# Altium PCB balancer.PcbDoc (part 2 of 2)
Units mil, origin at the board's own origin, x right, y up, seen from the top; angles counter-clockwise.
Board outline 6000 x 4000 mil, 2 copper layers (Top Layer, Bottom Layer); 234 components, 201 nets, 774 pads, 0 vias.
Unrouted connection lines stored in the file: 537.
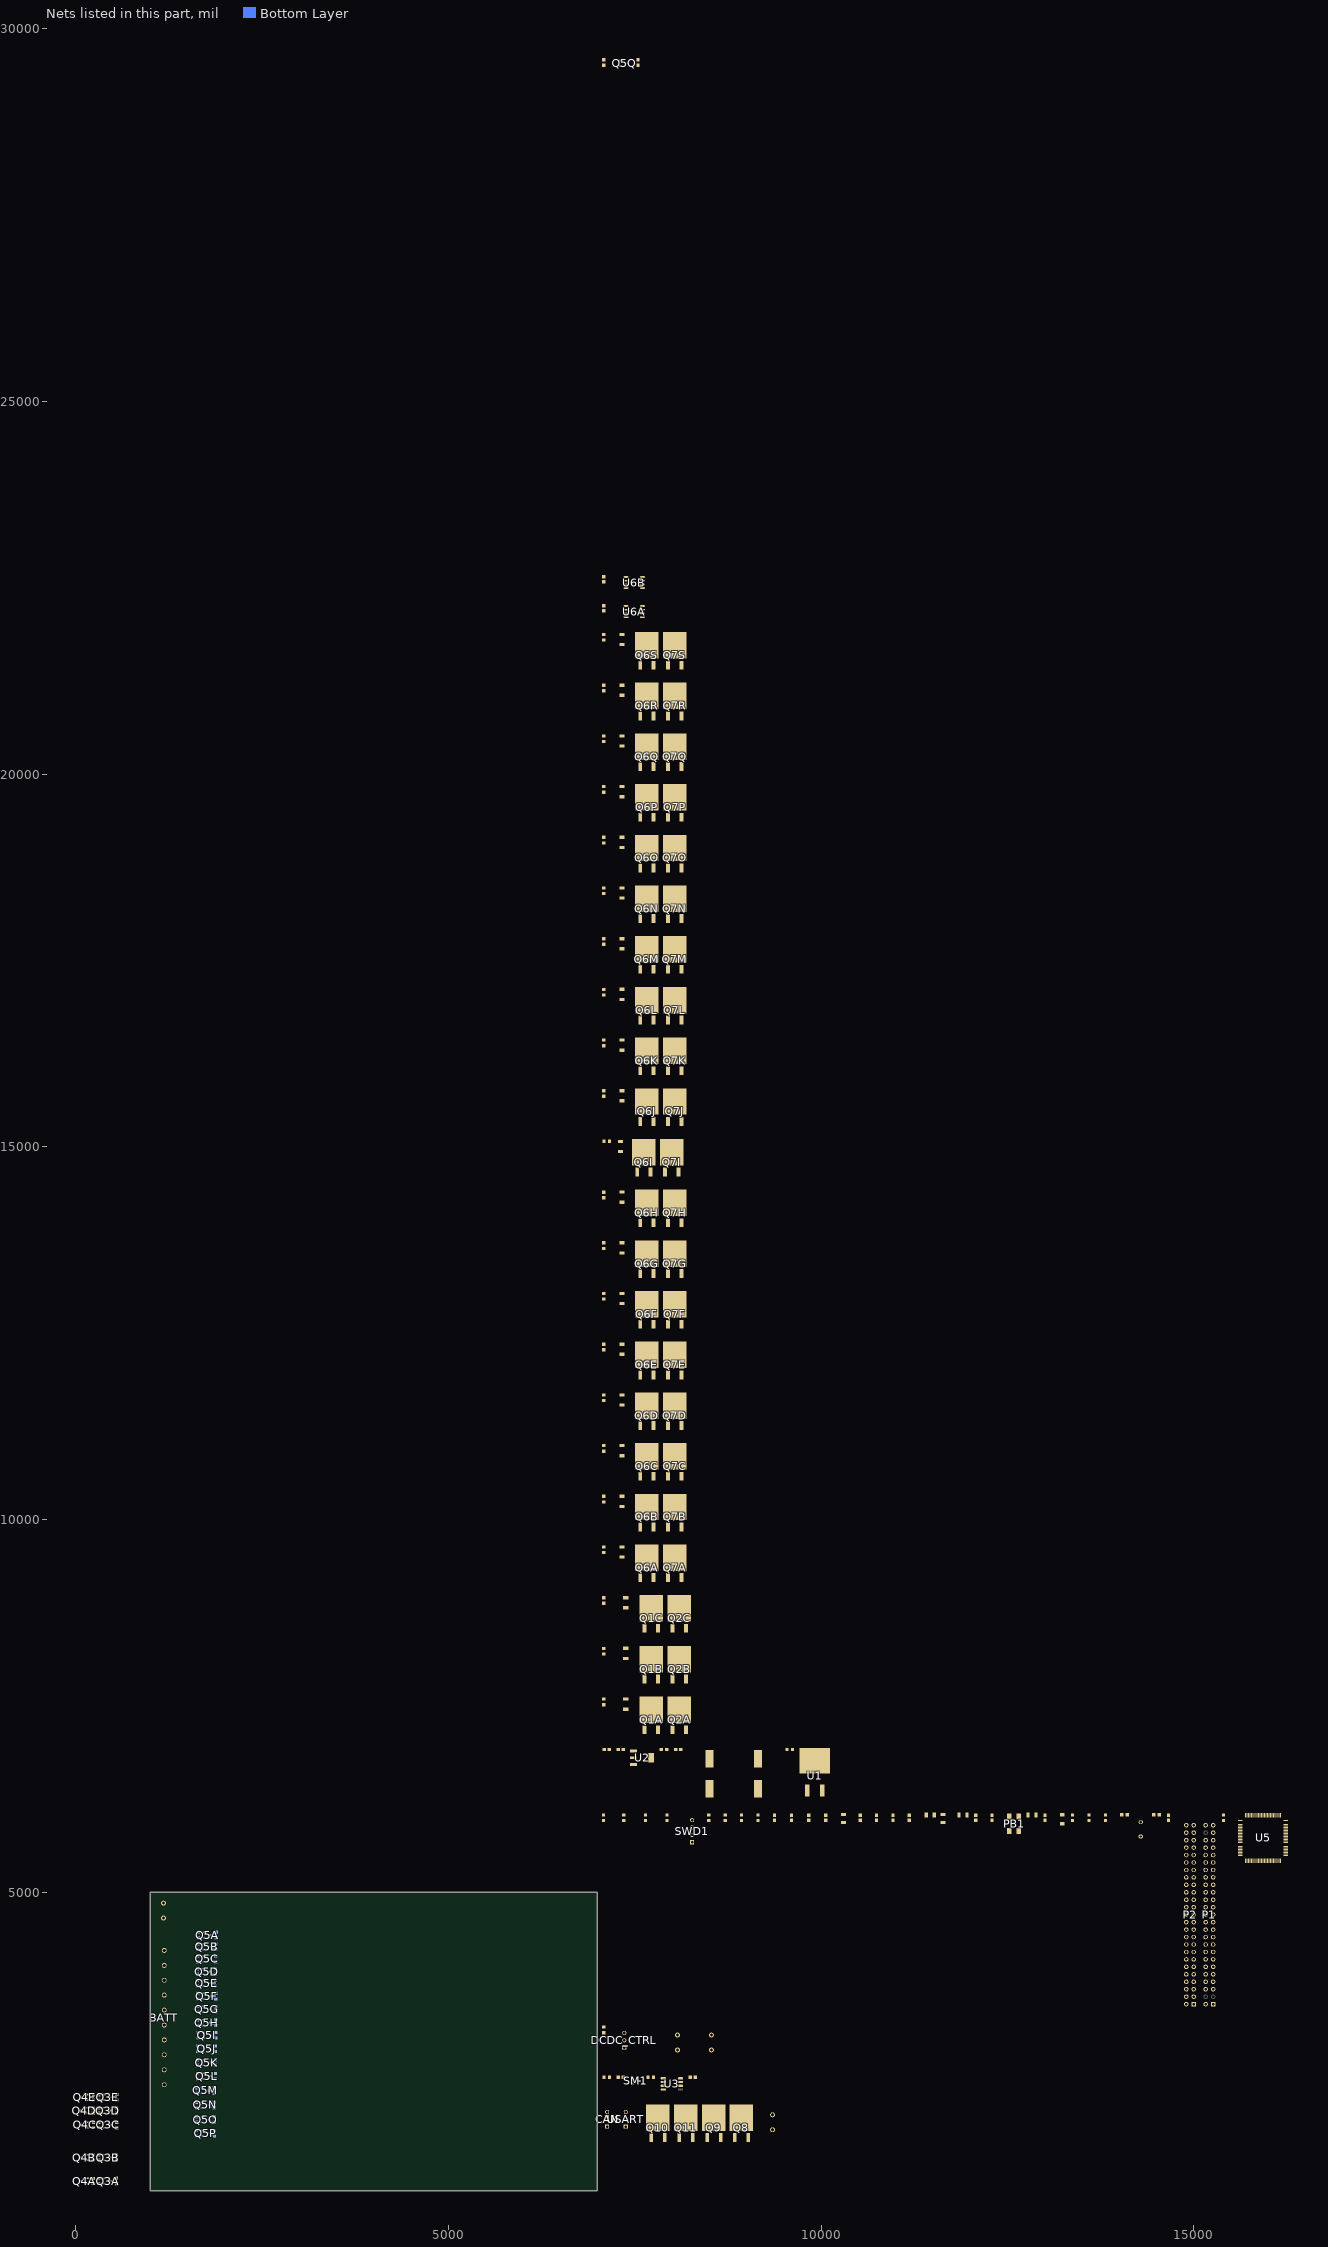
[diagram p2: the nets of this part, all layers, seen from the top]

## Part data
12IN AXBATT INPUT OUTPUT: library part "TERMINAL_BLOCK 1 × 2", "CONN, TERMINAL BLOCK, 5.08mm pitch", =http://www.chila.ir
BATT: library part BATTRY_pack
C1 C2: library part "CAP 10*10"
C3 C4 C5 C6 C10 C11 C13 C15 C16 C17 C18 C19 C20 C23 C24 C25 C26 C28A C28B: library part Capacitor, "Capacitor", LatestRevisionDate=17-Jul-2002, LatestRevisionNote="Re-released for DXP Platform.", PackageReference=C0805, Published=8-Jun-2000, Publisher="Altium Limited"
C7 C8: library part Cap, "Capacitor", LatestRevisionDate=17-Jul-2002, LatestRevisionNote="Re-released for DXP Platform.", PackageDescription="Radial Cap, Thru-Hole; 2 Leads; 0.3 in Pin Spacing", PackageReference=RAD-0.3, Published=8-Jun-2000, Publisher="Altium Limited"
C12 C14 C21 C22 C27: library part Cap_Tan, "Tantalium Capacitor Size C", LatestRevisionDate=17-Jul-2002, LatestRevisionNote="Re-released for DXP Platform.", PackageReference=C0805, Published=8-Jun-2000, Publisher="Altium Limited"
CAN DCDC_CTRL USART: library part Header1*3, "Header, 3-Pin", LatestRevisionDate=17-Jul-2002, LatestRevisionNote="Re-released for DXP Platform.", Publisher="Altium Limited"
L1: library part INDUCTOR, Code_IEC=1005, Code_JEITA=0402, LatestRevisionDate=17-Jul-2002, LatestRevisionNote="Re-released for DXP Platform.", PackageReference=0402-A, Published=8-Jun-2000, Publisher="Altium Limited"
LED1 LED2 LED3 LED4: library part LED, "LED", Adding Date=1387/12/22, Color=Red, Designer="Saeid Jorablo", Organazation=ControTec, Size="SMD 0603"
P1 P2: "Header, 25-Pin, Dual row", LatestRevisionDate=17-Jul-2002, LatestRevisionNote="Re-released for DXP Platform.", Publisher="Altium Limited"
PB1: library part Swtich-PB4, "4-Pin Push Button"
Q1A Q1B Q1C Q2A Q2B Q2C Q8 Q9 Q10 Q11: "N-Channel Power MOSFET", ComponentLink1Description="Manufacturer Link", ComponentLink1URL=http://www.irf.com/, DatasheetVersion=PD-9.814, LatestRevisionDate=17-Jul-2002, LatestRevisionNote="Re-released for DXP Platform.", Note="Pin 2 is electrically connected to pin 4.", PackageDescription="TO, Thru-Hole, Vertical, Heatsink Mounted; 3 In-Line Leads; Pitch 2.54 mm", PackageReference=TO-220AB, PackageVersion=Feb-1997, Published=8-Jun-2000, Publisher="Altium Limited"
Q3A Q3B Q3C Q3D Q3E: library part BC807, "45 V, 0.5 A"
Q4A Q4B Q4C Q4D Q4E Q5A Q5B Q5C Q5D Q5E Q5F Q5G Q5H Q5I Q5J Q5K Q5L Q5M Q5N Q5O Q5P Q5Q: library part BC817, "45 V, 0.5 A", Transistor=BC817
R1A R1B R1C R1D R1E R2A R2B R2C R2D R2E R3A R3B R3C R3D R3E R4A R4B R4C R4D R4E R4F R4G R4H R4I R4J R4K R4L R4M R4N R4O R4P R4Q R5A R5B R5C R5D R5E R5F R5G R5H R5I R5J R5K R5L R5M R5N R5O R5P R5Q R6A R6B R6C R6D R6E R6F R6G R6H R6I R6J R6K R6L R6M R6N R6O R6P R6Q R6R R6S R7 R10 R11 R12 R13 R14 R15 R16 R17 R18 R19A R19B R19C: library part Resistor, "0603,0.1W", LatestRevisionDate=17-Jul-2002, LatestRevisionNote="Re-released for DXP Platform.", PackageReference=AXIAL-0.5, Published=8-Jun-2000, Publisher="Altium Limited"
R8 R9: library part Resistor, "Resistor", Power="1/8 W", Tolerance=5%
SB3: library part SB_ON, ECCN_US/EU=n/a, Revision="July-2002: Re-released for DXP Platform.", Solder=YES
SM1: library part SM712, "Asymmetrical TVS Diode for Extended Common-Mode RS-485"
SWD1: library part Header1*4, "Header, 4-Pin"
U1: "IC REG LIN 5V 1A"
U2: library part AMS1117
U3: library part TJA1040, "1/1 Transceiver Half CANbus 8-SO", Package="SOIC-8 NXP USA", Availability=Unavailable, MF="NXP USA", MP=TJA1040, PRICE=None, SnapEDA_Link=https://www.snapeda.com/parts/TJA1040/NXP%20USA%20Inc./view-part/563351/?ref=snap
U5: "STM32 Manta (STM32F407VGT6)", Manuf_1=STM, Distrib=ST, ECCN_US/EU=3A991A2/NEC, Manuf_Part_1=STM32F407VGT6, Provided=ST, Ref St=9175122
U6A U6B: "Sensing Current"

## Nets (pads, with @x,y where several pads share a name; then routed paths per layer and width w, separated by ;. In a path a pad name is that pad's centre, name@x,y a point inside that pad or via, vN(x,y) a via of type N, cw(c..) or ccw(c..) an arc to the next point about the centre after c; other vN are vias at no path point)
3V3: C5.2 C17.1 C18.1 C19.1 C20.1 C23.1 C24.1 C25.1 C26.1 C27.1 L1.1 P2.5 P2.6 P2.22 R13.2 U2.2 U2.4 U5.6 U5.11 U5.19 U5.28 U5.50 U5.75 U5.100
5V: C2.1 C4.2 C6.2 C7.1 P2.3 P2.4 U1.3 U2.3 U3.3 U6A.8 U6B.8
12V: C1.1 C3.2 Q3A.2 Q3B.2 Q3C.2 Q3D.2 Q3E.2 R1A.2 R1B.2 R1C.2 R1D.2 R1E.2 R7.2 U1.1
12V_IN: 12IN.2 R7.1
BOOT0: P2.21 R12.2 U5.94
CAN_N: CAN.2 R8.2 SM1.1 U3.7
CAN_P: CAN.1 R9.1 SM1.2 U3.6
CAN_RX: P2.36 U3.4 U5.81
CAN_STB: P2.34 U3.8 U5.83
CAN_TX: P2.33 U3.1 U5.82
CurrentSensor_AX: P1.11 U5.24 U6A.7
CurrentSensor_pack: P1.22 U5.35 U6B.7
DAC_Current: DCDC_CTRL.2 P1.15 U5.30
DAC_Voltage: DCDC_CTRL.1 P1.16 U5.29
DCDC_RST1: P1.18 U5.31
DCDC_RST2: P1.17 U5.32
en_ax2pack: P2.47 R3A.1 R5G.1 U5.63
en_MainRelay: P1.20 U5.33
en_pack2ax: P2.48 R3E.1 R5Q.1 U5.64
G_neg_o_2: D1A.1 Q6A.1 Q7A.1 R4A.1 R6A.1
G_neg_o_3: D1B.1 Q6B.1 Q7B.1 R4B.1 R6B.1
G_neg_o_4: D1C.1 Q6C.1 Q7C.1 R4C.1 R6C.1
G_neg_o_5: D1D.1 Q6D.1 Q7D.1 R4D.1 R6D.1
G_neg_o_6: D1E.1 Q6E.1 Q7E.1 R4E.1 R6E.1
G_neg_o_7: D1F.1 Q6F.1 Q7F.1 R4F.1 R6F.1
G_neg_oN_8: D2A.2 Q1A.1 Q2A.1 R2B.1 R19A.2
G_neg_oN_9: D2B.2 Q1B.1 Q2B.1 R2C.1 R19B.2
G_neg_oN_10: D2C.2 Q1C.1 Q2C.1 R2D.1 R19C.2
G_pos_o1: D1K.1 Q6K.1 Q7K.1 R4H.1 R6K.1
G_pos_o2: D1L.1 Q6L.1 Q7L.1 R4I.1 R6L.1
G_pos_o3: D1M.1 Q6M.1 Q7M.1 R4J.1 R6M.1
G_pos_o4: D1N.1 Q6N.1 Q7N.1 R4K.1 R6N.1
G_pos_o5: D1O.1 Q6O.1 Q7O.1 R4L.1 R6O.1
G_pos_o6: D1P.1 Q6P.1 Q7P.1 R4M.1 R6P.1
G_pos_o7: D1Q.1 Q6Q.1 Q7Q.1 R4N.1 R6Q.1
G_pos_o8: D1R.1 Q6R.1 Q7R.1 R4O.1 R6R.1
G_pos_o9: D1S.1 Q6S.1 Q7S.1 R4P.1 R6S.1
GND: 12IN.1 C1.2 C2.2 C3.1 C4.1 C5.1 C6.1 C7.2 C8.2 C10.1 C11.1 C12.2 C13.2 C14.2 C15.1 C16.2 C17.2 C18.2 C19.2 C20.2 C21.2 C22.2 C23.2 C24.2 C25.2 C26.2 C27.2 C28A.1 C28B.1 CAN.3 INPUT.2 LED1.2 LED2.2 LED3.2 LED4.2 P1.1 P1.2 P1.5 P1.23 P1.49 P1.50 P2.1 P2.2 P2.49 P2.50 PB1.2 Q4A.2 Q4B.2 Q4C.2 Q4D.2 Q4E.2 Q5A.2 Q5B.2 Q5C.2 Q5D.2 Q5E.2 Q5F.2 Q5G.2 Q5H.2 Q5I.2 Q5J.2 Q5K.2 Q5L.2 Q5M.2 Q5N.2 Q5O.2 Q5P.2 Q5Q.2 Q10.3 Q11.3 R10.1 R11.1 R12.1 SB3.2 SM1.3 SWD1.4 U1.2 U2.1 U3.2 U5.10 U5.20 U5.27 U5.74 U6A.5 U6B.5 USART.3
LED1: P1.44 R18.2 U5.59
LED2: P1.45 R15.2 U5.60
LED3: P1.46 R16.2 U5.61
LED4: P1.47 R17.2 U5.62
LED5: P2.32 U5.85
LED6: P2.29 U5.86
LED7: P2.30 U5.87
LED8: P2.27 U5.88
M1_1: BATT.1 Q6K.3
M1_2: BATT.2 Q6A.3 Q6L.3
M1_3: BATT.3 Q6B.3 Q6M.3
M1_4: BATT.4 Q6C.3 Q6N.3
M1_5: BATT.5 Q6D.3 Q6O.3
M1_6: BATT.6 Q6E.3 Q6P.3
M1_7: BATT.7 Q6F.3 Q6Q.3
M1_8: BATT.8 Q1A.2 Q6R.3
M1_9: BATT.9 Q1B.2 Q6S.3
M1_10: BATT.10 Q1C.2
M2_neg: Q2A.2 Q2B.2 Q2C.2 Q7A.3 Q7B.3 Q7C.3 Q7D.3 Q7E.3 Q7F.3 Q9.2 Q10.2
M2_pos: Q7K.3 Q7L.3 Q7M.3 Q7N.3 Q7O.3 Q7P.3 Q7Q.3 Q7R.3 Q7S.3 U6B.1 U6B.2
M2_pos_sensed: Q6I.3 Q6J.3 U6B.3 U6B.4
NetAXBATT_1: AXBATT.1 U6A.1 U6A.2
NetAXBATT_2: AXBATT.2 Q8.2 Q11.2
NetC8_1: C8.1 R8.1 R9.2
NetC12_1: C12.1 C13.1 R14.1 U5.21
NetC14_1: C14.1 C15.2 L1.2 R14.2 U5.22
NetC21_1: C21.1 U5.73
NetC22_1: C22.1 U5.49
NetC28A_2: C28A.2 U6A.6
NetC28B_2: C28B.2 U6B.6
NetD1A_2: D1A.2 D1B.2 D1C.2 D1D.2 D1E.2 D1F.2 Q6A.2 Q6B.2 Q6C.2 Q6D.2 Q6E.2 Q6F.2 Q7A.2 Q7B.2 Q7C.2 Q7D.2 Q7E.2 Q7F.2 R6A.2 R6B.2 R6C.2 R6D.2 R6E.2 R6F.2
NetD1G_1: D1G.1 D1J.1 Q6G.1 Q6J.1 Q7G.1 Q7J.1 R4G.1 R6G.1 R6J.1
NetD1G_2: D1G.2 Q6G.2 Q7G.2 R6G.2
NetD1H_1: D1H.1 D1I.1 Q6H.1 Q6I.1 Q7H.1 Q7I.1 R4Q.1 R6H.1 R6I.1
NetD1H_2: D1H.2 Q6H.2 Q7H.2 R6H.2
NetD1I_2: D1I.2 Q6I.2 Q7I.2 R6I.2
NetD1J_2: D1J.2 Q6J.2 Q7J.2 R6J.2
NetD1K_2: D1K.2 D1L.2 D1M.2 D1N.2 D1O.2 D1P.2 D1Q.2 D1R.2 D1S.2 Q6K.2 Q6L.2 Q6M.2 Q6N.2 Q6O.2 Q6P.2 Q6Q.2 Q6R.2 Q6S.2 Q7K.2 Q7L.2 Q7M.2 Q7N.2 Q7O.2 Q7P.2 Q7Q.2 Q7R.2 Q7S.2 R6K.2 R6L.2 R6M.2 R6N.2 R6O.2 R6P.2 R6Q.2 R6R.2 R6S.2
NetD2A_1: D2A.1 D2B.1 D2C.1 Q1A.3 Q1B.3 Q1C.3 Q2A.3 Q2B.3 Q2C.3 R19A.1 R19B.1 R19C.1
NetDCDC_CTRL_3: DCDC_CTRL.3 SB3.1
NetINPUT_1: INPUT.1 Q7G.3 Q7I.3
NetLED1_1: LED1.1 R15.1
NetLED2_1: LED2.1 R16.1
NetLED3_1: LED3.1 R17.1
NetLED4_1: LED4.1 R18.1
NetOUTPUT_1: OUTPUT.1 Q7H.3 Q7J.3
NetOUTPUT_2: OUTPUT.2 Q8.3 Q9.3
NetQ3A_1: Q3A.1 Q4A.3 R1A.1
NetQ3A_3: Q3A.3 R2A.2
NetQ3B_1: Q3B.1 Q4B.3 R1B.1
NetQ3B_3: Q3B.3 R2B.2
NetQ3C_1: Q3C.1 Q4C.3 R1C.1
NetQ3C_3: Q3C.3 R2C.2
NetQ3D_1: Q3D.1 Q4D.3 R1D.1
NetQ3D_3: Q3D.3 R2D.2
NetQ3E_1: Q3E.1 Q4E.3 R1E.1
NetQ3E_3: Q3E.3 R2E.2
NetQ4A_1: Q4A.1 R3A.2
NetQ4B_1: Q4B.1 R3B.2
NetQ4C_1: Q4C.1 R3C.2
NetQ4D_1: Q4D.1 R3D.2
NetQ4E_1: Q4E.1 R3E.2
NetQ5A_1: Q5A.1 R5A.2 | length 72.8
  Bottom Layer w10: R5A.2@1647.87,4390 Q5A.1@1720.63,4390
NetQ5A_3: Q5A.3 R4A.2 | length 88.2
  Bottom Layer w10: Q5A.3@1815.12,4427.4 1822.99,4427.4 1843.74,4406.65 1871.22,4406.65 R4A.2@1887.87,4390
NetQ5B_1: Q5B.1 R5B.2 | length 72.8
  Bottom Layer w10: R5B.2@1640.63,4232.6 Q5B.1@1713.39,4232.6
NetQ5B_3: Q5B.3 R4B.2 | length 88.2
  Bottom Layer w10: Q5B.3@1807.87,4270 1815.75,4270 1836.5,4249.25 1863.98,4249.25 R4B.2@1880.63,4232.6
NetQ5C_1: Q5C.1 R5C.2 | length 72.8
  Bottom Layer w10: R5C.2@1640.63,4070 Q5C.1@1713.39,4070
NetQ5C_3: Q5C.3 R4C.2 | length 88.2
  Bottom Layer w10: Q5C.3@1807.87,4107.4 1815.75,4107.4 1836.5,4086.65 1863.98,4086.65 R4C.2@1880.63,4070
NetQ5D_1: Q5D.1 R5D.2 | length 72.8
  Bottom Layer w10: R5D.2@1637.87,3900 Q5D.1@1710.63,3900
NetQ5D_3: Q5D.3 R4D.2 | length 88.2
  Bottom Layer w10: Q5D.3@1805.12,3937.4 1812.99,3937.4 1833.74,3916.65 1861.22,3916.65 R4D.2@1877.87,3900
NetQ5E_1: Q5E.1 R5E.2 | length 72.8
  Bottom Layer w10: R5E.2@1637.87,3745 Q5E.1@1710.63,3745
NetQ5E_3: Q5E.3 R4E.2 | length 88.2
  Bottom Layer w10: Q5E.3@1805.12,3782.4 1812.99,3782.4 1833.74,3761.65 1861.22,3761.65 R4E.2@1877.87,3745
NetQ5F_1: Q5F.1 R5F.2 | length 72.8
  Bottom Layer w10: R5F.2@1640.63,3570 Q5F.1@1713.39,3570
NetQ5F_3: Q5F.3 R4F.2 | length 88.2
  Bottom Layer w10: Q5F.3@1807.87,3607.4 1815.75,3607.4 1836.5,3586.65 1863.98,3586.65 R4F.2@1880.63,3570
NetQ5G_1: Q5G.1 R5G.2 | length 72.8
  Bottom Layer w10: R5G.2@1642.87,3395 Q5G.1@1715.63,3395
NetQ5G_3: Q5G.3 R4G.2 | length 88.2
  Bottom Layer w10: Q5G.3@1810.12,3432.4 1817.99,3432.4 1838.74,3411.65 1866.22,3411.65 R4G.2@1882.87,3395
NetQ5H_1: Q5H.1 R5H.2 | length 72.8
  Bottom Layer w10: R5H.2@1640.63,3215 Q5H.1@1713.39,3215
NetQ5H_3: Q5H.3 R4H.2 | length 88.2
  Bottom Layer w10: Q5H.3@1807.87,3252.4 1815.75,3252.4 1836.5,3231.65 1863.98,3231.65 R4H.2@1880.63,3215
NetQ5I_1: Q5I.1 R5I.2 | length 72.8
  Bottom Layer w10: R5I.2@1642.87,3045 Q5I.1@1715.63,3045
NetQ5I_3: Q5I.3 R4I.2 | length 88.2
  Bottom Layer w10: Q5I.3@1810.12,3082.4 1817.99,3082.4 1838.74,3061.65 1866.22,3061.65 R4I.2@1882.87,3045
NetQ5J_1: Q5J.1 R5J.2 | length 72.8
  Bottom Layer w10: R5J.2@1637.87,2865 Q5J.1@1710.63,2865
NetQ5J_3: Q5J.3 R4J.2 | length 88.2
  Bottom Layer w10: Q5J.3@1805.12,2902.4 1812.99,2902.4 1833.74,2881.65 1861.22,2881.65 R4J.2@1877.87,2865
NetQ5K_1: Q5K.1 R5K.2 | length 72.8
  Bottom Layer w10: R5K.2@1637.87,2678.82 Q5K.1@1710.63,2678.82
NetQ5K_3: Q5K.3 R4K.2 | length 88.2
  Bottom Layer w10: Q5K.3@1805.12,2716.22 1812.99,2716.22 1833.74,2695.48 1861.22,2695.48 R4K.2@1877.87,2678.82
NetQ5L_1: Q5L.1 R5L.2 | length 72.8
  Bottom Layer w10: R5L.2@1637.87,2495 Q5L.1@1710.63,2495
NetQ5L_3: Q5L.3 R4L.2 | length 88.2
  Bottom Layer w10: Q5L.3@1805.12,2532.4 1812.99,2532.4 1833.74,2511.65 1861.22,2511.65 R4L.2@1877.87,2495
NetQ5M_1: Q5M.1 R5M.2 | length 72.8
  Bottom Layer w10: R5M.2@1621.22,2305 Q5M.1@1693.98,2305
NetQ5M_3: Q5M.3 R4M.2 | length 88.2
  Bottom Layer w10: Q5M.3@1788.46,2342.4 1796.34,2342.4 1817.09,2321.65 1844.57,2321.65 R4M.2@1861.22,2305
NetQ5N_1: Q5N.1 R5N.2 | length 72.8
  Bottom Layer w10: R5N.2@1621.22,2110 Q5N.1@1693.98,2110
NetQ5N_3: Q5N.3 R4N.2 | length 88.2
  Bottom Layer w10: Q5N.3@1788.46,2147.4 1796.34,2147.4 1817.09,2126.65 1844.57,2126.65 R4N.2@1861.22,2110
NetQ5O_1: Q5O.1 R5O.2 | length 72.8
  Bottom Layer w10: R5O.2@1621.22,1915 Q5O.1@1693.98,1915
NetQ5O_3: Q5O.3 R4O.2 | length 88.2
  Bottom Layer w10: Q5O.3@1788.46,1952.4 1796.34,1952.4 1817.09,1931.65 1844.57,1931.65 R4O.2@1861.22,1915
NetQ5P_1: Q5P.1 R5P.2 | length 72.8
  Bottom Layer w10: R5P.2@1622.87,1730 Q5P.1@1695.63,1730
NetQ5P_3: Q5P.3 R4P.2 | length 88.2
  Bottom Layer w10: Q5P.3@1790.12,1767.4 1797.99,1767.4 1818.74,1746.65 1846.22,1746.65 R4P.2@1862.87,1730
NetQ5Q_1: Q5Q.1 R5Q.2
NetQ5Q_3: Q5Q.3 R4Q.2
NetQ6G_3: Q6G.3 Q6H.3 U6A.3 U6A.4
NetQ8_1: Q8.1 Q10.1 R2E.1
NetQ9_1: Q9.1 Q11.1 R2A.1
NetR11_2: R11.2 U5.99
NRST: C16.1 P1.6 PB1.1 R13.1 SWD1.3 U5.14
PA0: P1.12 U5.23
PA2: P1.14 U5.25 USART.1
PA3: P1.13 U5.26 USART.2
PA8: P2.43 U5.67
PA9: P2.44 U5.68
PA10: P2.41 U5.69
PA11: U5.70
PA12: U5.71
PA13: P2.42 SWD1.1 U5.72
PA14: P2.39 SWD1.2 U5.76
PA15: P2.40 U5.77
PB1: P1.21 U5.36
PB2: P1.24 R10.2 U5.37
PB3: P2.28 U5.89
PB4: P2.25 U5.90
PB5: P2.26 U5.91
PB6: P2.23 U5.92
PB7: P2.24 U5.93
PB8: P2.19 U5.95
PB9: P2.20 U5.96
PC0: P1.8 U5.15
PC1: P1.7 U5.16
PC2: P1.10 U5.17
PC3: P1.9 U5.18
PC5: P1.19 U5.34
PC8: P2.45 U5.65
PC9: P2.46 U5.66
PC10: P2.37 U5.78
PC11: P2.38 U5.79
PC12: P2.35 U5.80
PC13: P2.12 U5.7
PC14: P2.9 U5.8
PC15: P2.10 U5.9
PD3: P2.31 U5.84
PD11: P1.43 U5.58
PE0: P2.17 U5.97
PE1: P2.18 U5.98
PE2: P2.15 U5.1
PE3: P2.16 U5.2
PE4: P2.13 U5.3
PE5: P2.14 U5.4
PE6: P2.11 U5.5
PH0: C10.2 P2.7 U5.12 Y1.2
PH1: C11.2 P2.8 U5.13 Y1.1
trig_neg_2: P1.34 R5A.1 U5.47
trig_neg_3: P1.35 R5B.1 U5.48
trig_neg_4: P1.36 R5C.1 U5.51
trig_neg_5: P1.37 R5D.1 U5.52
trig_neg_6: P1.38 R5E.1 U5.53
trig_neg_7: P1.39 R5F.1 U5.54
trig_neg_8: P1.40 R3B.1 U5.55
trig_neg_9: P1.41 R3C.1 U5.56
trig_neg_10: P1.42 R3D.1 U5.57
trig_pos_1: P1.25 R5H.1 U5.38
trig_pos_2: P1.26 R5I.1 U5.39
trig_pos_3: P1.27 R5J.1 U5.40
trig_pos_4: P1.28 R5K.1 U5.41
trig_pos_5: P1.29 R5L.1 U5.42
trig_pos_6: P1.30 R5M.1 U5.43
trig_pos_7: P1.31 R5N.1 U5.44
trig_pos_8: P1.32 R5O.1 U5.45
trig_pos_9: P1.33 R5P.1 U5.46
pads on no net: P1.3 P1.4 P1.48 U3.5

## Text inside footprints (layer, text, board x,y; h text height)
BATT: Top Overlay "B10" at 1404.6,2403.82 h78.74; Top Overlay "B9" at 1404.6,2603.93 h78.74; Top Overlay "B8" at 1404.6,2804.12 h78.74; Top Overlay "B7" at 1404.6,3003.14 h78.74; Top Overlay "B6" at 1404.6,3204.27 h78.74; Top Overlay "B5" at 1404.6,3404.38 h78.74; Top Overlay "B4" at 1404.6,3603.48 h78.74; Top Overlay "B3" at 1404.6,3804.61 h78.74; Top Overlay "B2" at 1404.6,4003.7 h78.74; Top Overlay "B1" at 1404.6,4203.82 h78.74
P1: Top Overlay "2" at 15180,3400 h50 r90; Top Overlay "1" at 15280,3400 h50 r90; Top Overlay "49" at 15280,5980 h50 r90; Top Overlay "50" at 15180,5980 h50 r90
P2: Top Overlay "2" at 14920,3400 h50 r90; Top Overlay "1" at 15020,3400 h50 r90; Top Overlay "49" at 15020,5980 h50 r90; Top Overlay "50" at 14920,5980 h50 r90